# Altium PCB 3D Export.PcbDoc
Units mm, origin at the board's own origin, x right, y up, seen from the top; angles counter-clockwise.
Board outline 140.3 x 94.24 mm, 2 copper layers (Top Layer, Bottom Layer); 15 components, 179 nets, 93 pads, 0 vias.
Unrouted connection lines stored in the file: 11.
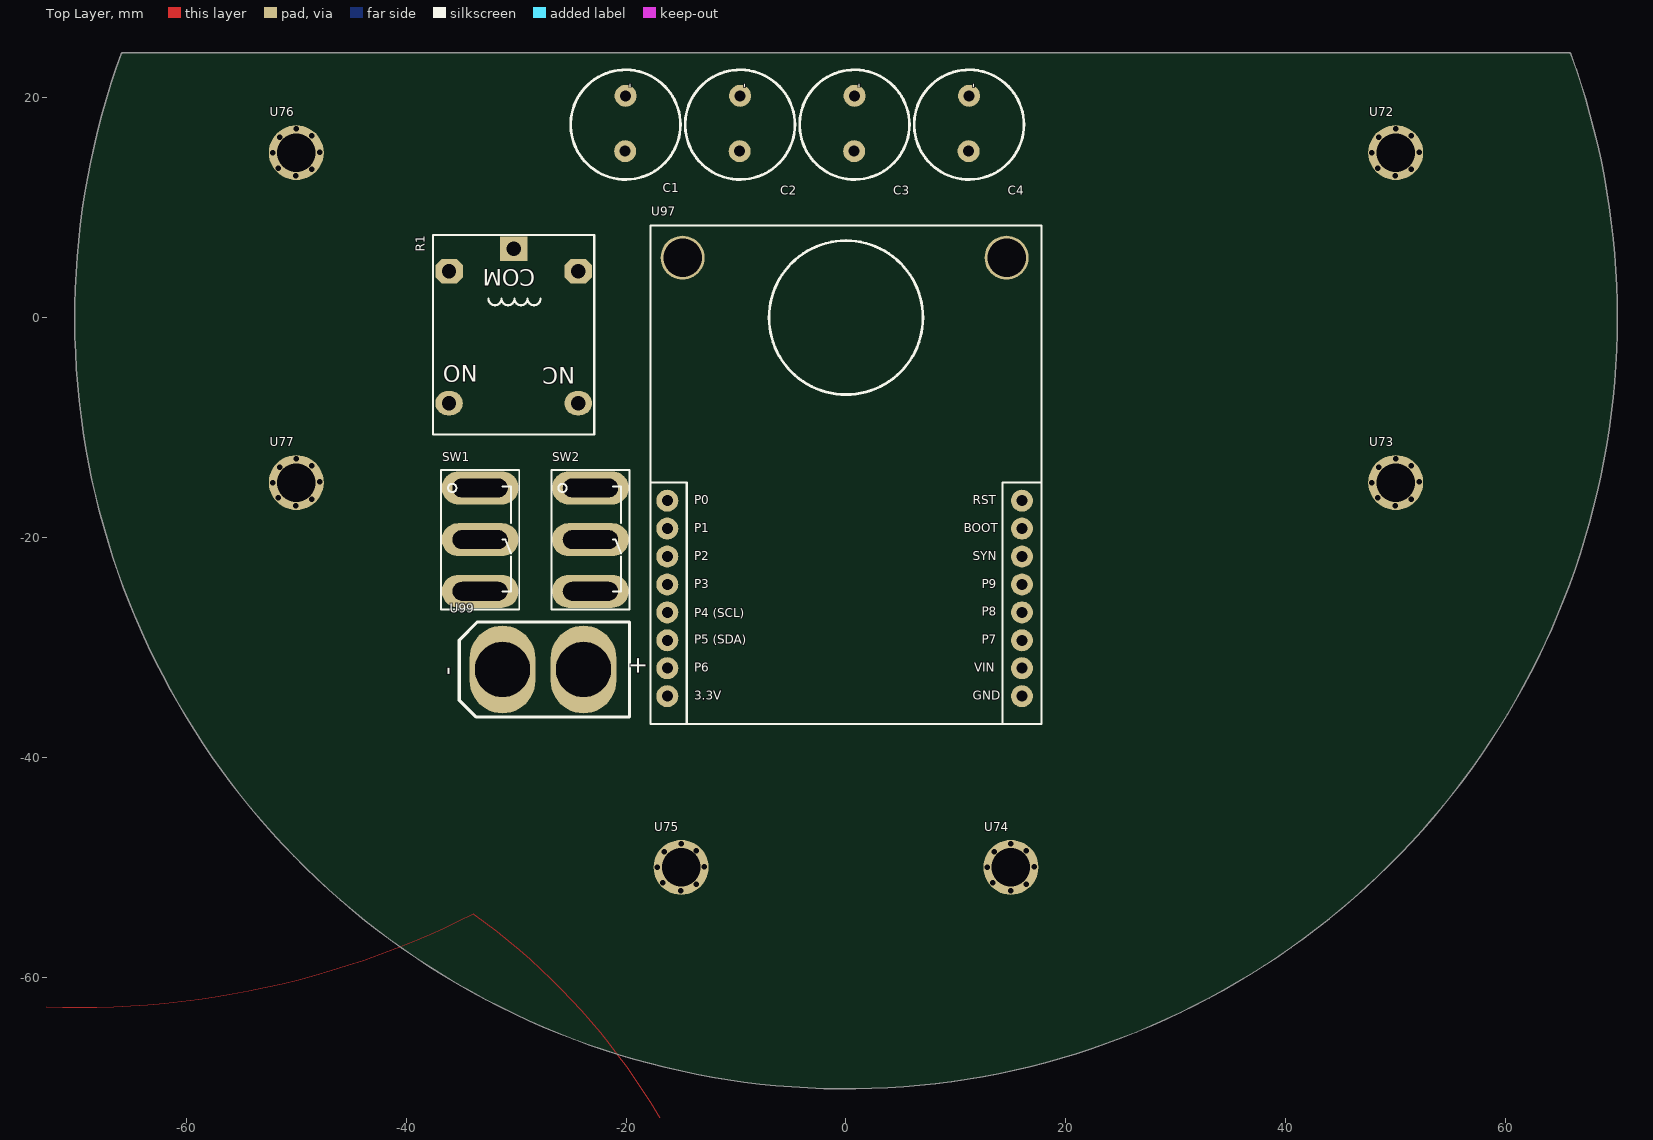
[diagram p0: Top Layer view]
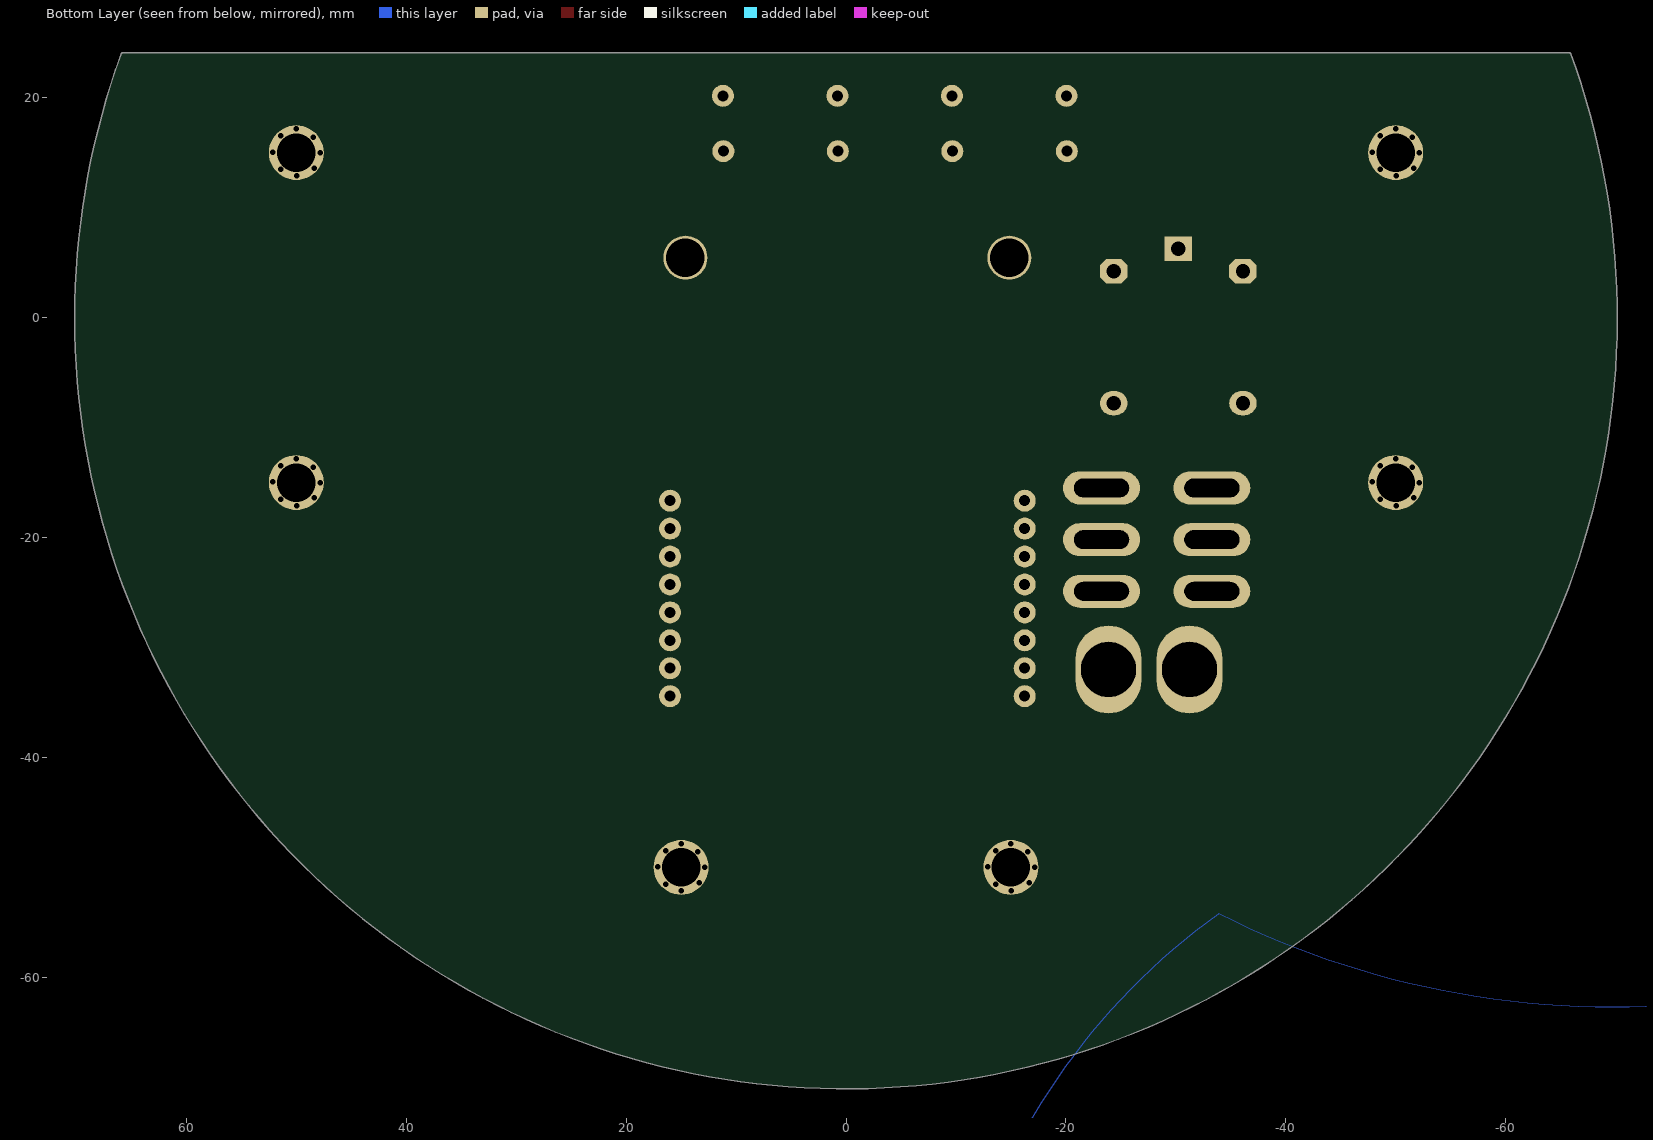
[diagram p1: Bottom Layer view, seen from below]

## Layer stack, top to bottom
Top Solder: solder mask 0.0102, Solder Resist, Dk 3.5
Top Layer: signal copper 0.0356
Dielectric 1: dielectric 0.32, FR-4, Dk 4.8
Bottom Layer: signal copper 0.0356
Bottom Solder: solder mask 0.0102, Solder Resist, Dk 3.5

## Board outline
-65.92,23.993 ccw(c0,0) 70.15,0 ccw(c0,0) 65.92,23.993 ccw(c65.778,23.941) 65.778,24.092 -65.778,24.092 ccw(c-65.778,23.941)

## Design rules (kind name [scope] priority, off if disabled: settings)
Clearance [All] p1: gap=1 ignorepadtopadclearanceinfootprint=FALSE except(0.25: Arc-Arc Arc-Track Arc-SMDPad Track-Track Track-SMDPad SMDPad-SMDPad; 0.254: Arc-THPad Arc-Via Arc-Text Arc-Hole Track-THPad Track-Via Track-Text Track-Hole SMDPad-THPad SMDPad-Via SMDPad-Text SMDPad-Hole THPad-THPad THPad-Via THPad-Text THPad-Hole Via-Via Via-Text Via-Hole Text-Text Text-Hole; 0.5: Fill-Text Fill-Hole Poly-Text Poly-Hole Region-Text Region-Hole)
ComponentClearance [All] p1 off: gap=0.254 collisioncheckmode=3 verticalgap=0.254 showdistances=FALSE
Height [All] p1 off: minheight=0 maxheight=25.4 prefheight=12.7
PolygonConnect [All] p1: connectstyle=Direct reliefconductorwidth=0.5 reliefentries=4 polygonreliefangle="90 Angle" airgapwidth=0.5
RoutingVias [All] p1: holewidth=0.3 width=0.6 viastyle="Through Hole" minholewidth=0.25 minwidth=0.25 maxholewidth=1 maxwidth=1
SolderMaskExpansion [All] p1: expansion=0.102 istentingtop=FALSE
Width [All] p1: maxlimit=10 minlimit=0.25 preferedwidth=0.8
28 further rules are at their usual default settings.

## Components (designator, comment, footprint, x,y, rotation, side; value= is the part's Value field where it differs from the comment)
C1 "Comment" "MY_CAP_POL 10MM" -20.066,17.653 r90 top
C2 "Comment" "MY_CAP_POL 10MM" -9.652,17.653 r90 top
C3 "Comment" "MY_CAP_POL 10MM" 0.762,17.653 r90 top
C4 "Comment" "MY_CAP_POL 10MM" 11.176,17.653 r90 top
R1 "Comment" "Relay 18.85x15.35x15.70" -30.226,-0.762 r180 top
SW1 "Comment" "Switch SPDT - 500x270x1100x185 mil" -33.274,-20.193 r0 top
SW2 "Comment" "Switch SPDT - 500x270x1100x185 mil" -23.241,-20.193 r0 top
U72 "Comment" SCREW 50,15 r0 top
U73 "Comment" SCREW 50,-15 r0 top
U74 "Comment" SCREW 15,-50 r0 top
U75 "Comment" SCREW -15,-50 r0 top
U76 "Comment" SCREW -50,15 r0 top
U77 "Comment" SCREW -50,-15 r0 top
U97 "Comment" OpenMV 0,-15 r0 top locked
U99 "Comment" XT60 -26.035,-32.004 r270 top

## Footprints (in the part's own frame and the unit in brackets; to place one, negate y for a bottom-side part, rotate by r counter-clockwise, add the part's x,y. Pads: shape width x height; smd on the part's side, far side on the other; paste and mask are expansions set on the pad)
"MY_CAP_POL 10MM" [mm]
  round 2 hole 1: +(-2.517,0.02) -(2.517,-0.02)
  silkscreen extent -5.09,-5 4.89,4.97, body extent -5.13,-5.07 5.03,5.09, height 10.16
OpenMV [mm]
  round 2 hole 1: 1(-16.256,-19.431) 2(-16.256,-16.891) 3(-16.256,-14.351) 4(-16.256,-11.811) 5(-16.256,-9.271) 6(-16.256,-6.731) 7(-16.256,-4.191) 8(-16.256,-1.651) 9(16.002,-19.431) 10(16.002,-16.891) 11(16.002,-14.351) 12(16.002,-11.811) 13(16.002,-9.271) 14(16.002,-6.731) 15(16.002,-4.191) 16(16.002,-1.651)
  round 4 hole 3.5: 17(14.605,20.447) 18(-14.859,20.447)
  silkscreen extent -17.78,-21.97 17.78,23.37, body extent -17.92,-22.12 17.9,23.58, height 38.95
"Relay 18.85x15.35x15.70" [mm]
  rect 2.5x2.2 hole 1.3: 1(0,-7.025)
  oval 2.5x2.2 hole 1.3: 2(-5.875,7.025) 3(5.875,7.025)
  oct 2.5x2.2 hole 1.3: 4(-5.875,-4.975) 5(5.875,-4.975)
  silkscreen extent -7.33,-8.27 7.33,9.88, body extent -7.37,-8.72 7.63,9.98, height 15.7
SCREW [mm]
  round 5 hole 3.5: 1(0,0)
  round 0 hole 0.5: ""(-2.159,0) ""(-1.651,-1.397) ""(-1.524,1.397) ""(-0.031,-2.11) ""(0,2.159) ""(1.397,-1.524) ""(1.397,1.524) ""(2.128,0.059)
"Switch SPDT - 500x270x1100x185 mil" [mm]
  oval 7x3 hole 1.7 slot 5 at 0 deg: 1(0,-4.699) 2(0,0) 3(0,4.699)
  silkscreen extent -3.56,-6.35 3.56,6.35, body extent -3.42,-6.35 3.44,6.35, height 28.62
XT60 [mm]
  oval 8x6 hole 5: 1(0,2.159) 2(0,-5.207)
  silkscreen extent -4.32,-9.14 4.32,6.35, body extent -3.75,-9.72 3.75,6.83, height 16

## Nets (pads, with @x,y where several pads share a name; then routed paths per layer and width w, separated by ;. In a path a pad name is that pad's centre, name@x,y a point inside that pad or via, vN(x,y) a via of type N, cw(c..) or ccw(c..) an arc to the next point about the centre after c; other vN are vias at no path point)
3.3V: 
5V: R1.4 U97.10
12V: SW2.3
+3.3V: 
+5: 
A: 
ADC0: 
ADC1: 
ADC2: 
ADC3: 
ADC4: 
ADC5: 
ADC6: 
ADC7: 
ADC8: 
ADC9: 
ADC10: 
ADC11: 
ADC12: 
ADC13: 
ADC14: 
ADC15: 
ADCOUT: 
ADD0: 
ADD1: 
ADD2: 
ADD3: 
ADD4: 
"AIR MIX MA +": 
"AIR MIX MA -": 
B: 
b11: 
b12: 
b13: 
b14: 
b21: 
b22: 
b23: 
b24: 
BAT_Volt: 
BOOST_CTRL: 
BOOT0: 
buz: 
Buzzer: 
DIP1: 
DIP2: 
DIPSW1: 
DIPSW2: 
ENA_1: 
ENA_2: 
ENA_3: 
ENA_4: 
ENB_1: 
ENB_2: 
ENB_3: 
ENB_4: 
GATE: 
GATE_BOOST: 
GATE_RELAY: 
GND: C1.- C2.- C3.- C4.- U97.9 U99.2
I2C_SCL: 
I2C_SDA: 
ID: 
INA1: 
INA2: 
INA3: 
INA4: 
INA_1: 
INA_2: 
INA_3: 
INA_4: 
INB1: 
INB2: 
INB3: 
INB4: 
INB_1: 
INB_2: 
INB_3: 
INB_4: 
Inductor: 
IO: 
LED1: 
LED2: 
LED3: 
LED3_RES: 
LED4: 
LED5: 
M1: 
MA1: 
MA2: 
MA3: 
MA4: 
MB1: 
MB2: 
MB3: 
MB4: 
"MODE MA +": 
"MODE MA -": 
MOTOR: 
MOTORS_EN: 
NET1: 
NetD5_1: 
NewNet: 
NRST: 
OSC_IN: 
OSC_OUT: 
OUT: 
OUT_1A: 
OUT_1B: 
OUT_2A: 
OUT_2B: 
OUT_3A: 
OUT_3B: 
OUT_4A: 
OUT_4B: 
PWM1: 
PWM2: 
PWM3: 
PWM4: 
PWM_1: 
PWM_2: 
PWM_3: 
PWM_4: 
RELAY: R1.5
RELAY_CTRL: 
RES1: 
RES2: 
RES3: 
RES4: 
RES5: 
RX: 
RX2: 
S3: 
S4: 
S5: 
S6: 
S7: 
S8: 
S9: 
S10: 
S11: 
S12: 
S13: 
S14: 
S15: 
SCL: U97.4
SDA: U97.3
SHIFT5: 
shoot: 
spin: 
SW1: 
SW2: 
SW3: 
SW4: 
SW5: 
SWCLK: 
SWDIO: 
SWR1: 
SWR2: 
SWR3: 
SWR4: 
SWR5: 
TX: 
TX2: 
UART1_RX: 
UART1_TX: 
UART2_RX: 
UART2_TX: 
VBat: U99.1
VBOOST: R1.3
VCC: 
VIN: SW1.2 SW2.2
VP: 
VREF1: 
VREF2: 
VREF3: 
VREF4: 
VSHOOT: R1.1
VSS: C1.+ C2.+ C3.+ C4.+ SW1.3
pads on no net: R1.2 SW1.1 SW2.1 U72. U72.1 U73. U73.1 U74. U74.1 U75. U75.1 U76. U76.1 U77. U77.1 U97.1 U97.2 U97.5 U97.6 U97.7 U97.8 U97.11 U97.12 U97.13 U97.14 U97.15 U97.16 U97.17 U97.18
copper on no net: | length 51.7
  Bottom Layer w0.254: -55.347,-291.123 -55.347,-290.615 ; -53.823,-291.377 -55.347,-290.869 ; -53.823,-290.361 -55.347,-290.869 ; -33.208,-290.869 -55.347,-290.869 ; -17.414,-290.869 4.724,-290.869 ; 3.2,-291.377 4.724,-290.869 ; 3.2,-290.361 4.724,-290.869 ; 4.724,-291.123 4.724,-290.615

## Polygon pours and split planes (outlines as drawn)
GND on Top Layer "NONET_L01_P002" (solid, shelved, pour order 2): -117.08,-152.197 cw(c-69.444,-103.671) -131.72,-130.978 -131.775,-130.926 -135.204,-130.926 -135.23,-130.934 -135.23,-120.943 -127.965,-120.943 -127.962,-120.959 cw(c-69.418,-103.824) -127.708,-85.842 -127.737,-85.815 -135.306,-85.815 -135.306,-76.824 -135.331,-76.773 -124.409,-76.773 -124.286,-76.732 cw(c-69.52,-103.595) -105.451,-54.301 -105.441,-54.28 ccw(c-69.715,17.002) -33.911,-54.24 -33.85,-54.252 cw(c-69.469,-103.773) -15.167,-75.982 -15.113,-75.985 -3.708,-75.985 -3.708,-86.018 -3.759,-86.044 -11.074,-86.044 -11.071,-86.155 cw(c-69.494,-103.697) -11.035,-121.118 -11.05,-121.139 -3.786,-121.122 -3.81,-121.121 -3.81,-131.078 -7.239,-131.078 -7.214,-131.084 cw(c-69.444,-103.671) -22.228,-152.607 -22.301,-152.693 -29.553,-145.442 -29.552,-145.442 cw(c-69.63,-103.725) -44.097,-155.635 -44.145,-155.645 -44.145,-168.949 -44.241,-168.977 cw(c-69.444,-103.671) -94.814,-168.912 -94.818,-168.899 -94.869,-155.721 -94.963,-155.682 cw(c-69.418,-103.671) -110.009,-145.023 -110.033,-145.124
GND on Bottom Layer "NONET_L02_P003" (solid, shelved, pour order 3): -117.08,-152.197 cw(c-69.444,-103.671) -131.72,-130.978 -131.775,-130.926 -135.204,-130.926 -135.23,-130.934 -135.23,-120.943 -127.965,-120.943 -127.962,-120.959 cw(c-69.418,-103.824) -127.708,-85.842 -127.737,-85.815 -135.306,-85.815 -135.306,-76.824 -135.331,-76.773 -124.409,-76.773 -124.286,-76.732 cw(c-69.52,-103.595) -105.451,-54.301 -105.441,-54.28 ccw(c-69.715,17.002) -33.911,-54.24 -33.85,-54.252 cw(c-69.469,-103.773) -15.167,-75.982 -15.113,-75.985 -3.708,-75.985 -3.708,-86.018 -3.759,-86.044 -11.074,-86.044 -11.071,-86.155 cw(c-69.494,-103.697) -11.035,-121.118 -11.05,-121.139 -3.786,-121.122 -3.81,-121.121 -3.81,-131.078 -7.239,-131.078 -7.214,-131.084 cw(c-69.444,-103.671) -22.228,-152.607 -22.301,-152.693 -29.553,-145.442 -29.552,-145.442 cw(c-69.63,-103.725) -44.097,-155.635 -44.145,-155.645 -44.145,-168.949 -44.241,-168.977 cw(c-69.444,-103.671) -94.814,-168.912 -94.818,-168.899 -94.869,-155.721 -94.963,-155.682 cw(c-69.418,-103.671) -110.009,-145.023 -110.033,-145.124

## Other copper
Bottom Layer:
  text "60.071 (mm)" at -32.954,-291.784 h1.52

## Silkscreen, mask and mechanical layers (free items; w line width, h text height)
Mechanical 1:
  lines w0.3: -65.778,23.941 ccw(c0,0) 65.778,23.941 -65.778,23.941

## Text inside footprints (layer, text, board x,y; h text height)
C1: Top Overlay "-" at -19.313,20.9 h0.8 r90
C2: Top Overlay "-" at -8.899,20.9 h0.8 r90
C3: Top Overlay "-" at 1.515,20.9 h0.8 r90
C4: Top Overlay "-" at 11.929,20.9 h0.8 r90
R1: Top Overlay "COM" at -28.245,4.42 h1.5 r180; Top Overlay "NO" at -33.477,-4.318 h1.5 r180; Top Overlay "NC" at -24.638,-4.496 h1.5 r180
U97: Top Overlay "P0" at -13.79,-16.979 h0.8; Top Overlay "P1" at -13.79,-19.519 h0.8; Top Overlay "P2" at -13.79,-22.059 h0.8; Top Overlay "P3" at -13.79,-24.599 h0.8; Top Overlay "3.3V" at -13.79,-34.759 h0.8; Top Overlay "P6" at -13.79,-32.219 h0.8; Top Overlay "P7" at 12.33,-29.679 h0.8; Top Overlay "P8" at 12.33,-27.139 h0.8; Top Overlay "P9" at 12.33,-24.599 h0.8; Top Overlay "SYN" at 11.53,-22.059 h0.8; Top Overlay "BOOT" at 10.731,-19.519 h0.8; Top Overlay "RST" at 11.53,-16.979 h0.8; Top Overlay "P4 (SCL)" at -13.79,-27.266 h0.8; Top Overlay "P5 (SDA)" at -13.79,-29.679 h0.8; Top Overlay "VIN" at 11.664,-32.219 h0.8; Top Overlay "GND" at 11.53,-34.759 h0.8
U99: Top Overlay "+" at -19.558,-32.512 h1.52 r270; Top Overlay "-" at -36.703,-32.512 h1.52 r270